# EAGLE board sch (EAGLE 8.6.0)
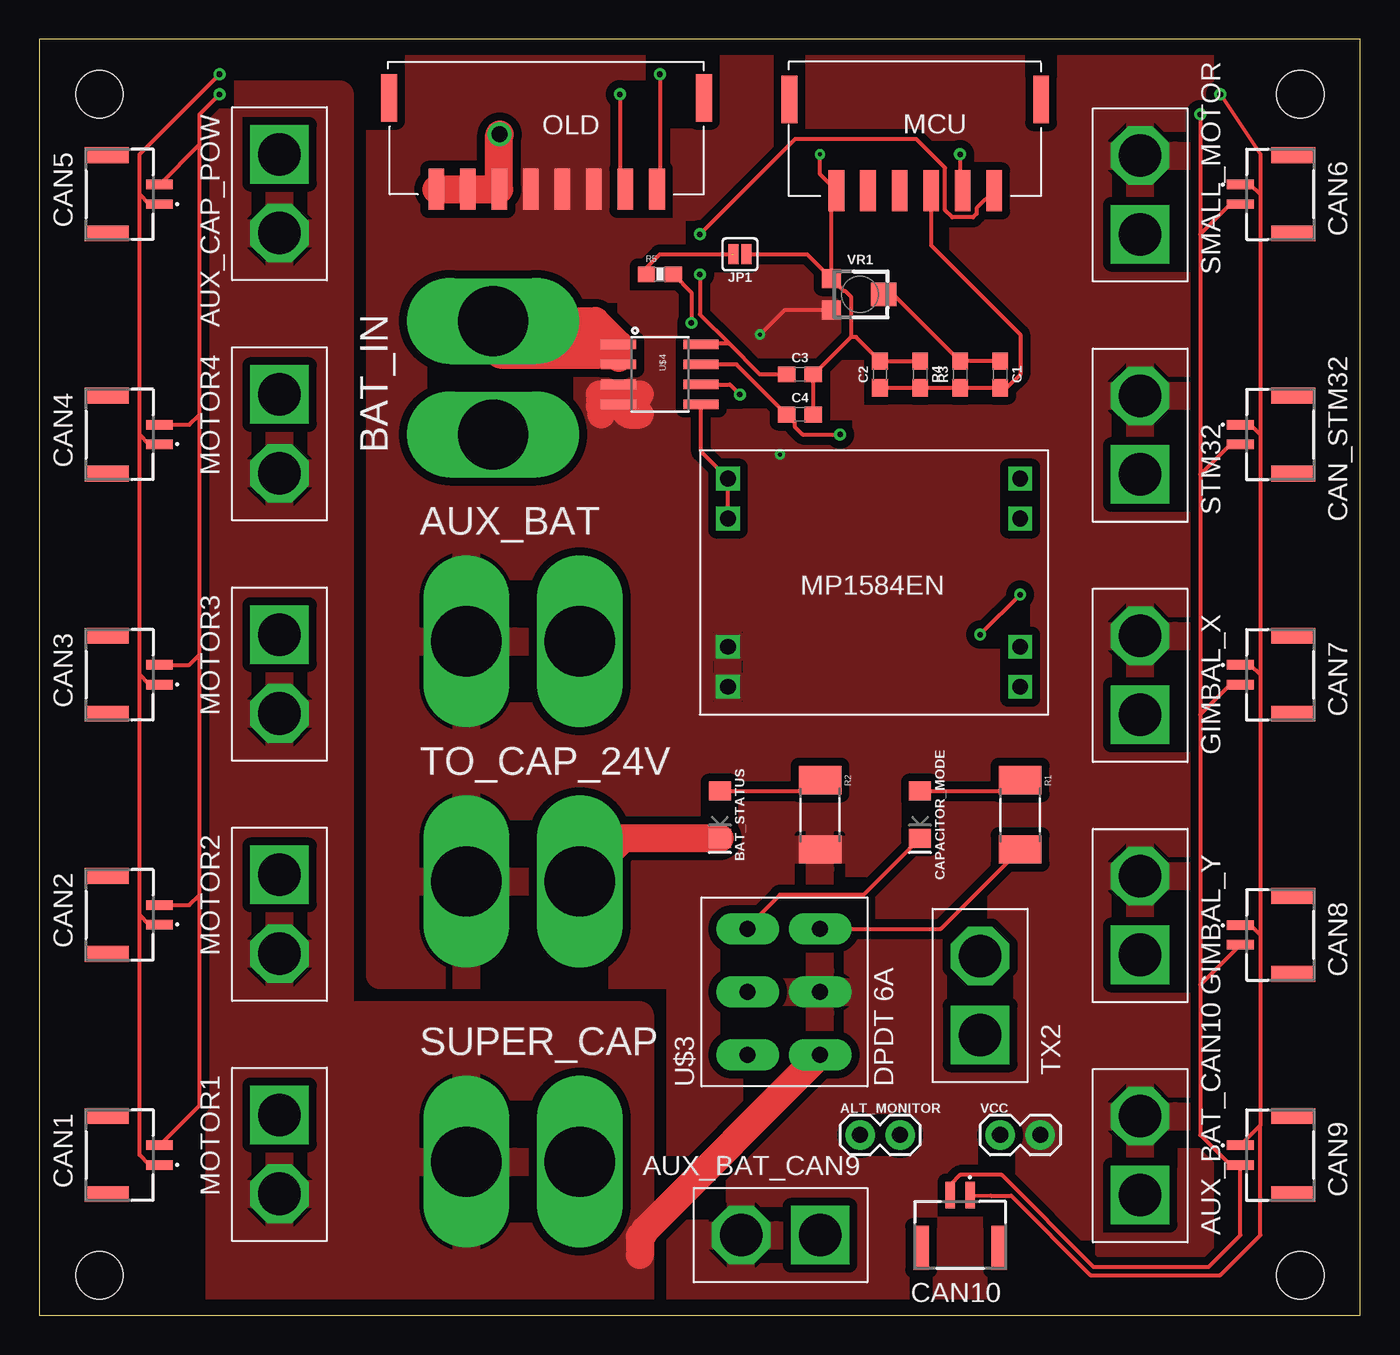
[diagram p0: board, top side]
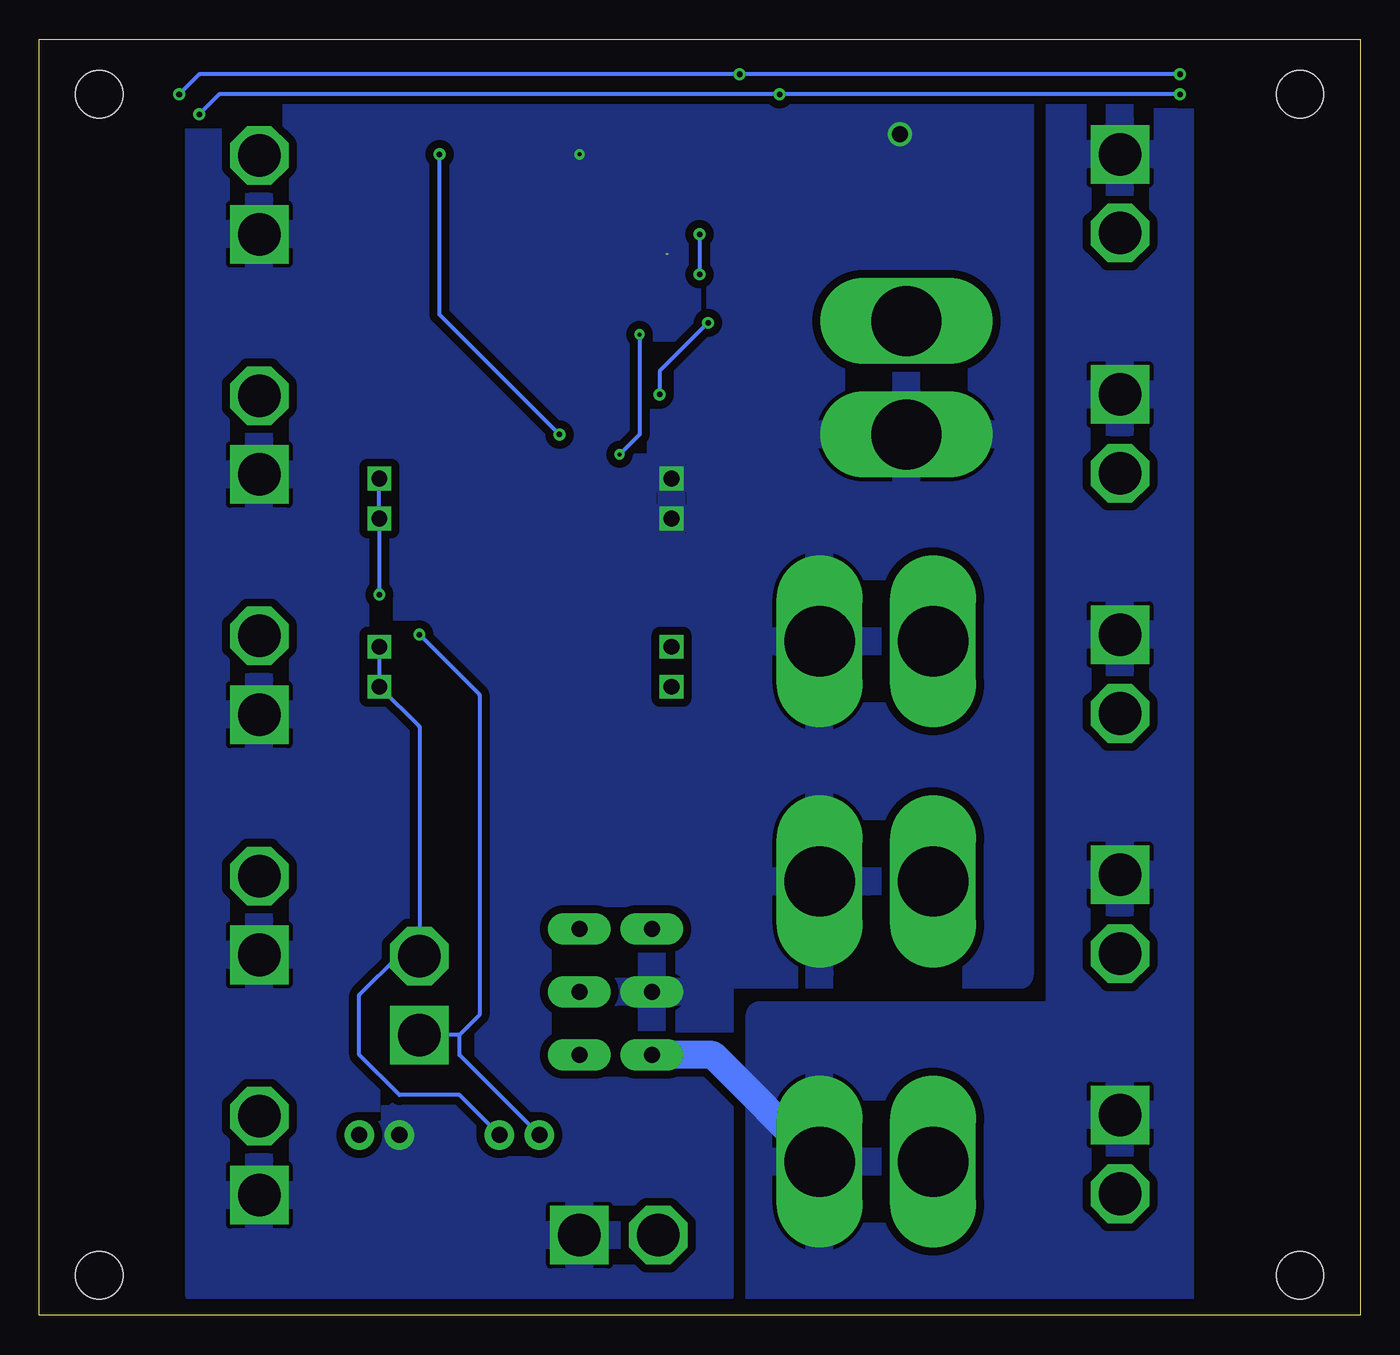
[diagram p1: board, bottom side, seen from below]

Size 83.8 x 80.95 mm. Coordinates in mm from the lower left corner, seen from the top.
Outline: 0,0 83.8,0 83.8,80.95 0,80.95 0,0
Copper layers (1*16): Top 0.035mm / dielectric 1.5mm / Bottom 0.035mm
Design rules "default": minimum track width 6mil, minimum drill 0.35mm, track to track 6mil, track to pad 6mil, pad to pad 6mil, via to via 6mil, smd to smd 6mil, copper to edge 40mil, drill to drill 6mil, minimum pad ring 10mil, minimum via ring 8mil, stop-mask expansion 4mil, vias tented up to drill 0mil, thermal gap 10mil
Net classes: 0 default: width 1.778 mm, drill 1.016 mm, clearance 0.508 mm; 1 sig: width 0.254 mm, drill 0.254 mm, clearance 0.254 mm
Holes 3 mm at 3.81,77.47 80.01,77.47 80.01,2.54 3.81,2.54

## Footprints (pad centres in the part's own frame; a part is rotated, then mirrored left to right if it is on the bottom)
1X02 = drill 1.016 pad 1.88: 1 0,0; 2 2.54,0
XT60 = drill 4.45 long: 1 -7.2,7.2; 2 0,7.2
XT30 = drill 2.7 square: P$1 0,0 | drill 2.7 octagon: P$2 5,0
LED-1206 = smd 1.2 x 1.4: A -1.5,0; C 1.5,0
0603 = smd 1.1 x 1: 1 -0.85,0; 2 0.85,0
BM02B-GHS-TBT_1 = smd 0.6 x 1.7: 1 0.625,0; 2 -0.625,0 | smd 1 x 2.8: 3 -2.475,-3.35; 4 2.475,-3.35
SMT-JUMPER_2_NO_SILK = smd 0.635 x 1.27: 1 -0.406,0; 2 0.406,0
S6B-PH-SM4_TB = smd 1 x 2.6: 1 5.46,9.68; 2 7.46,9.68; 3 9.46,9.68; 4 11.46,9.68; 5 13.46,9.68; 6 15.46,9.68 | smd 1 x 3: GND 2.476,3.88; GND2 18.444,3.88
S8B-PH-SM4_TB = smd 1 x 2.6: 1 4,7.3; 2 6,7.3; 3 8,7.3; 4 10,7.3; 5 12,7.3; 6 14,7.3; 7 16,7.3; 8 18,7.3 | smd 1 x 3: 9 1.016,1.5; 10 20.984,1.5
R2010 = smd 1.8 x 2.7: 1 -2.2,0; 2 2.2,0
0603-RES = smd 1.1 x 1: 1 -0.85,0; 2 0.85,0
MP1584_AMAZON = drill 1 square: 1 1.778,14.986; 2 1.778,12.446; 3 1.778,4.318; 4 1.778,1.778; 5 20.32,14.986; 6 20.32,12.446; 7 20.32,4.318; 8 20.32,1.778
DPDT = drill 1 pad 2 long: P$1 0,0; P$2 4,0; P$3 8,0; P$4 0,4.6; P$5 4,4.6; P$6 8,4.6
SO08 = smd 0.61 x 2.21: 1 -1.905,-2.616; 2 -0.635,-2.616; 3 0.635,-2.616; 4 1.905,-2.616; 5 1.905,2.616; 6 0.635,2.616; 7 -0.635,2.616; 8 -1.905,2.616
TRIMPOT-SMD-TC33X = smd 1.2 x 1.2: 1 -1,-1.825; 3 1,-1.825 | smd 1.5 x 1.6: 2 0,1.5

## Placement (x,y rotation side)
ALT_MONITOR  [1X02]  52.07,11.43 0 top
AUX_BAT  XT60  [XT60]  34.29,35.56 0 top
AUX_BAT_CAN9  XT30  [XT30]  49.53,5.08 180 top
AUX_BAT_CAN10  XT30  [XT30]  69.85,7.62 90 top
AUX_CAP_POW  XT30  [XT30]  15.24,73.66 270 top
BAT_IN  XT60  [XT60]  21.59,55.88 270 top
BAT_STATUS  3V 20mA  [LED-1206]  43.18,31.75 270 top
C1  0.1uF  [0603]  60.96,59.69 270 top
C2  0.1uF  [0603]  53.34,59.69 90 top
C3  0.1uF  [0603]  48.26,59.69 0 top
C4  1nF  [0603]  48.26,57.15 0 top
CAN1  BM02B-GHS-TBT(LF)(SN)  [BM02B-GHS-TBT_1]  7.62,10.16 270 top
CAN2  BM02B-GHS-TBT(LF)(SN)  [BM02B-GHS-TBT_1]  7.62,25.4 270 top
CAN3  BM02B-GHS-TBT(LF)(SN)  [BM02B-GHS-TBT_1]  7.62,40.64 270 top
CAN4  BM02B-GHS-TBT(LF)(SN)  [BM02B-GHS-TBT_1]  7.62,55.88 270 top
CAN5  BM02B-GHS-TBT(LF)(SN)  [BM02B-GHS-TBT_1]  7.62,71.12 270 top
CAN6  BM02B-GHS-TBT(LF)(SN)  [BM02B-GHS-TBT_1]  76.2,71.12 90 top
CAN7  BM02B-GHS-TBT(LF)(SN)  [BM02B-GHS-TBT_1]  76.2,40.64 90 top
CAN8  BM02B-GHS-TBT(LF)(SN)  [BM02B-GHS-TBT_1]  76.2,24.13 90 top
CAN9  BM02B-GHS-TBT(LF)(SN)  [BM02B-GHS-TBT_1]  76.2,10.16 90 top
CAN10  BM02B-GHS-TBT(LF)(SN)  [BM02B-GHS-TBT_1]  58.42,7.62 0 top
CAN_STM32  BM02B-GHS-TBT(LF)(SN)  [BM02B-GHS-TBT_1]  76.2,55.88 90 top
CAPACITOR_MODE  3V 20mA  [LED-1206]  55.88,31.75 270 top
GIMBAL_X  XT30  [XT30]  69.85,38.1 90 top
GIMBAL_Y  XT30  [XT30]  69.85,22.86 90 top
JP1  JUMPER-SMT_2_NO_SILK  [SMT-JUMPER_2_NO_SILK]  44.45,67.31 180 top
MCU  S6B-PH-SM4_TB  [S6B-PH-SM4_TB]  66.04,81.03 180 top
MOTOR1  XT30  [XT30]  15.24,12.7 270 top
MOTOR2  XT30  [XT30]  15.24,27.94 270 top
MOTOR3  XT30  [XT30]  15.24,43.18 270 top
MOTOR4  XT30  [XT30]  15.24,58.42 270 top
OLD  S8B-PH-SM4_TB  [S8B-PH-SM4_TB]  43.18,78.74 180 top
R1  1.2K  [R2010]  62.23,31.75 270 top
R2  1.2K  [R2010]  49.53,31.75 270 top
R3  10k  [0603]  58.42,59.69 90 top
R4  2.0k  [0603]  55.88,59.69 270 top
R5  4.7K  [0603-RES]  39.37,66.04 0 top
SMALL_MOTOR  XT30  [XT30]  69.85,68.58 90 top
STM32  XT30  [XT30]  69.85,53.34 90 top
SUPER_CAP  XT60  [XT60]  34.29,2.54 0 top
TO_CAP_24V  XT60  [XT60]  34.29,20.32 0 top
TX2  XT30  [XT30]  59.69,17.78 90 top
U$2  MP1584  [MP1584_AMAZON]  41.91,38.1 0 top
U$3  DPDT  [DPDT]  49.53,16.51 90 top
U$4  ACS723  [SO08]  39.37,59.69 270 top
VCC  [1X02]  60.96,11.43 0 top
VR1  10k  [TRIMPOT-SMD-TC33X]  52.07,64.77 270 top

## Library data of the parts
ALT_MONITOR VCC = SparkFun-Connectors
AUX_BAT AUX_BAT_CAN9 AUX_BAT_CAN10 AUX_CAP_POW BAT_IN GIMBAL_X GIMBAL_Y MCU MOTOR1-MOTOR4 SMALL_MOTOR STM32 SUPER_CAP TO_CAP_24V TX2 U$2 U$3 = NewKevinMade
BAT_STATUS CAPACITOR_MODE = SparkFun-LED
C1-C3 = SparkFun-Capacitors; PROD_ID: CAP-00810
C4 = SparkFun-Capacitors; PROD_ID: CAP-07886
CAN1-CAN10 CAN_STM32 = SamacSys_Parts; DESCRIPTION: GH 1.25mm header top entry 2 way JST GH Series, 1.25mm Pitch 2 Way Shrouded Straight PCB Header, Surface Mount, Solder Termination; HEIGHT: mm; MANUFACTURER_NAME: JST (JAPAN SOLDERLESS TERMINALS); MANUFACTURER_PART_NUMBER: BM02B-GHS-TBT(LF)(SN); RS_PART_NUMBER: 7521762P
JP1 = SparkFun-Jumpers
OLD = KevinMade
R1 R2 = SparkFun-Passives
R3 = SparkFun-Resistors; PROD_ID: RES-00824
R4 = SparkFun-Resistors; PROD_ID: RES-08296
R5 = SparkFun-Resistors; PROD_ID: RES-07857
U$4 = SparkFun-Sensors; PART_#: ACS723ACS723LLCTR-05AB-T2; PROD_ID: IC-13872
VR1 = SparkFun-Resistors; PROD_ID: RES-12428, RES-08048

## Nets
ALT_GND [sig]: ALT_MONITOR.1 TX2.P$1 U$2.5 U$2.6
ALT_VCC [sig]: ALT_MONITOR.2 TX2.P$2 U$2.7 U$2.8
ANALOG_OUT [sig]: C1.2 C2.1 MCU.3 R3.1 R4.2
BAT_24V: AUX_BAT.1 AUX_BAT_CAN9.P$2 AUX_BAT_CAN10.P$2 GIMBAL_X.P$2 GIMBAL_Y.P$2 OLD.3 OLD.4 OLD.5 R2.2 SMALL_MOTOR.P$2 STM32.P$2 TO_CAP_24V.1 U$2.3 U$2.4 U$3.P$2 U$4.3 U$4.4 VCC.2 VR1.3
BAT_GND: AUX_BAT.2 AUX_BAT_CAN9.P$1 AUX_BAT_CAN10.P$1 BAT_IN.2 BAT_STATUS.C C2.2 C3.2 C4.2 GIMBAL_X.P$1 GIMBAL_Y.P$1 JP1.1 MCU.6 OLD.6 OLD.7 OLD.8 R4.1 SMALL_MOTOR.P$1 STM32.P$1 TO_CAP_24V.2 U$2.1 U$2.2 U$3.P$5 U$4.5 VCC.1 VR1.1
BAT_IN: BAT_IN.1 U$4.1 U$4.2
BW_SEL [sig]: R5.2 U$4.6
CANH [sig]: CAN1.2 CAN2.2 CAN3.2 CAN4.2 CAN5.2 CAN6.2 CAN7.2 CAN8.2 CAN9.2 CAN10.2 CAN_STM32.2 OLD.2
CANL [sig]: CAN1.1 CAN2.1 CAN3.1 CAN4.1 CAN5.1 CAN6.1 CAN7.1 CAN8.1 CAN9.1 CAN10.1 CAN_STM32.1 OLD.1
CAP_24V: AUX_CAP_POW.P$2 MOTOR1.P$2 MOTOR2.P$2 MOTOR3.P$2 MOTOR4.P$2 SUPER_CAP.1 U$3.P$1
CAP_GND: AUX_CAP_POW.P$1 MOTOR1.P$1 MOTOR2.P$1 MOTOR3.P$1 MOTOR4.P$1 SUPER_CAP.2 U$3.P$4
MCU_VCC [sig]: C3.1 MCU.1 U$4.8
N$1 [sig]: R1.2 U$3.P$3
N$2 [sig]: CAPACITOR_MODE.A R1.1
N$3 [sig]: CAPACITOR_MODE.C U$3.P$6
N$4 [sig]: JP1.2 R5.1
N$5 [sig]: BAT_STATUS.A R2.1
N$8 [sig]: C1.1 R3.2 VR1.2
N$10: MCU.4
N$11: MCU.5
VIOUT [sig]: C4.1 MCU.2 U$4.7

## Tracks (layer width: path | path; a pad name or v marks a point on that pad's centre or on a via)
ALT_GND  (via drill 0.35)
  Top 0.254: v62.23,45.72 v59.69,43.18
  Bottom 0.254: U$2.5 U$2.6 v62.23,45.72 | v59.69,43.18 55.88,39.37 55.88,19.05 57.15,17.78 | 57.15,17.78 TX2.P$1 | ALT_MONITOR.1 57.15,16.51 57.15,17.78
ALT_VCC
  Bottom 0.254: U$2.7 U$2.8 59.69,37.34 59.69,22.86 | 59.69,22.86 TX2.P$2 | ALT_MONITOR.2 57.15,13.97 60.96,13.97 63.5,16.51 63.5,20.32 60.96,22.86 59.69,22.86
ANALOG_OUT
  Top 0.254: C2.1 R4.2 R3.1 C1.2 | C1.2 60.96,58.95 | MCU.3 56.58,67.88 62.23,62.23 62.23,59.69 61.38,58.84 C1.2
BAT_24V  (via drill 0.25)
  Top 0.254: VR1.3 47.26,63.77 v45.72,62.23
  Top 0.381: 36.75,58.98 U$4.3
  Top 0.762: U$4.4 36.75,58.98
  Top 1.778: 36.75,58.47 U$4.4 | U$4.4 37.39,58.42 38.1,58.42 | U$4.4 37.39,57.15 38.1,57.15 | U$4.4 36.2,57.78 35.56,58.42 35.56,57.68 35.65,57.59 35.65,57.15
  Bottom 0.254: v45.72,62.23 45.72,55.88 v46.99,54.61
  pour Top: 21.59,80.01 21.59,21.59 39.37,21.59 40.64,21.59 40.64,0 73.66,0 73.66,80.01
BAT_GND  (via drill 0.25, 1.02)
  Top 0.254: v49.53,73.66 49.53,72.4 MCU.6 50.24,71.01 VR1.1 | U$2.2 U$2.1 41.99,54.79 U$4.5 | VR1.1 51.01,65 51.11,65 51.48,64.63 51.48,62.06 | 51.48,62.06 C3.2 C4.2 | 51.48,62.06 51.82,62.06 C2.2 R4.1 | JP1.1 48.7,67.31 VR1.1
  Top 1.778: OLD.8 OLD.7 OLD.6 29.18,74.9 v29.21,74.93 | BAT_STATUS.C 37.02,30.25 TO_CAP_24V.2
  pour Bottom: 21.59,80.01 21.59,21.59 40.64,21.59 40.64,1.27 73.66,1.27 73.66,80.01
BAT_IN
  Top 0.889: U$4.1 U$4.2
  Top 1.778: BAT_IN.1 35.27,63.08 U$4.1 36.75,60.76 | 31.75,62.23 34.29,62.23 35.56,60.96 29.21,60.96 28.79,61.38 BAT_IN.1 | BAT_IN.1 29.64,62.23 30.48,62.23
BW_SEL  (via drill 0.35)
  Top 0.254: R5.2 41.37,64.89 v41.37,62.96 | U$4.6 43.81,59.05 v44.45,58.42
  Bottom 0.254: v41.37,62.96 44.45,59.89 v44.45,58.42
CANH  (via drill 0.35)
  Top 0.254: CAN1.2 10.16,13.32 10.16,26.67 | v11.43,77.47 10.16,76.2 10.16,74.28 | v73.66,76.2 73.66,68.58 | 73.66,68.58 73.66,53.34 | 73.66,53.34 73.66,38.1 | 73.66,38.1 73.66,20.96 | 73.66,20.96 73.66,11.43 75.56,9.54 CAN9.2 76.2,5.08 74.17,3.05 66.9,3.05 61.06,8.89 58.42,8.89 57.8,8.27 CAN10.2 | 10.16,26.67 10.16,41.91 | 10.16,41.91 10.16,57.15 | 10.16,57.15 10.16,74.28 | CAN2.2 9.52,26.02 10.16,26.67 | CAN3.2 9.52,41.27 10.16,41.91 | CAN4.2 9.52,56.51 10.16,57.15 | CAN5.2 10.16,74.28 | v36.83,77.47 36.83,71.79 OLD.2 | CAN6.2 75.58,70.5 73.66,68.58 | CAN_STM32.2 75.58,55.26 73.66,53.34 | CAN7.2 75.58,40.02 73.66,38.1 | CAN8.2 73.66,20.96
  Bottom 0.254: v11.43,77.47 v36.83,77.47 72.39,77.47 v73.66,76.2
CANL  (via drill 0.35)
  Top 0.254: CAN1.1 6.97,9.54 6.35,10.16 6.35,25.4 | 6.35,25.4 6.35,40.64 | 6.35,40.64 6.35,55.88 | 6.35,55.88 6.35,71.12 | 6.35,71.12 6.35,73.66 v11.43,78.74 | v74.93,77.47 77.47,73.66 77.47,71.12 | 77.47,12.05 CAN9.1 | 77.47,71.12 77.47,55.88 | 77.47,55.88 77.47,40.64 | 77.47,40.64 77.47,24.13 | 77.47,24.13 77.47,12.05 | CAN2.1 6.97,24.77 6.35,25.4 | CAN3.1 6.97,40.02 6.35,40.64 | CAN4.1 6.97,55.26 6.35,55.88 | CAN5.1 6.97,70.5 6.35,71.12 | v39.37,78.74 39.37,71.63 OLD.1 | CAN6.1 76.84,71.75 77.47,71.12 | CAN_STM32.1 76.84,56.51 77.47,55.88 | CAN7.1 76.84,41.27 77.47,40.64 | CAN8.1 76.84,24.75 77.47,24.13 | CAN10.1 60.36,7.58 61.66,7.58 66.69,2.54 74.93,2.54 77.47,5.08 77.47,12.05
  Bottom 0.254: v11.43,78.74 v39.37,78.74 73.66,78.74 v74.93,77.47
CAP_24V
  Top 1.778: U$3.P$1 38.42,5.4 38.42,5.3 38.1,4.98 38.1,3.81
  pour Top: 11.43,77.47 19.05,77.47 19.05,19.05 38.1,19.05 38.1,0 11.43,0
CAP_GND
  Bottom 1.778: SUPER_CAP.2 41.06,16.51 U$3.P$4
  pour Bottom: 11.43,77.47 11.43,0 38.1,0 38.1,19.05 19.05,19.05 19.05,77.47
MCU_VCC  (via drill 0.35)
  Top 0.254: U$4.8 41.95,61.63 43.78,61.63 | C3.1 45.72,59.69 43.78,61.63 | MCU.1 59.46,70.23 59.46,69.89 59.24,69.67 57.92,69.67 57.46,70.13 57.46,72.8 55.64,74.62 47.95,74.62 v41.91,68.58 | v41.91,66.04 41.91,63.5 43.78,61.63
  Bottom 0.254: v41.91,68.58 v41.91,66.04
N$1
  Top 0.254: U$3.P$3 57.19,24.51 R1.2
N$2
  Top 0.254: CAPACITOR_MODE.A 61.53,33.25 R1.1
N$3
  Top 0.254: CAPACITOR_MODE.C 52.3,26.67 46.99,26.67 44.93,24.61 U$3.P$6
N$4  (1 unrouted)
  Top 0.254: R5.1 38.52,66.46 39.37,67.31 43.18,67.31 43.9,67.31
N$5
  Top 0.254: BAT_STATUS.A 48.83,33.25 R2.1
N$8
  Top 0.254: VR1.2 54.19,64.77 R3.2 C1.1
VIOUT  (via drill 0.35)
  Top 0.254: U$4.7 44.23,60.33 C4.1 47.92,56.63 47.92,56.39 48.43,55.88 v50.8,55.88 | v58.42,73.66 58.42,71.51 MCU.2
  Bottom 0.254: v50.8,55.88 58.42,63.5 v58.42,73.66